# EAGLE board rectifier_board (EAGLE 9.6.2)
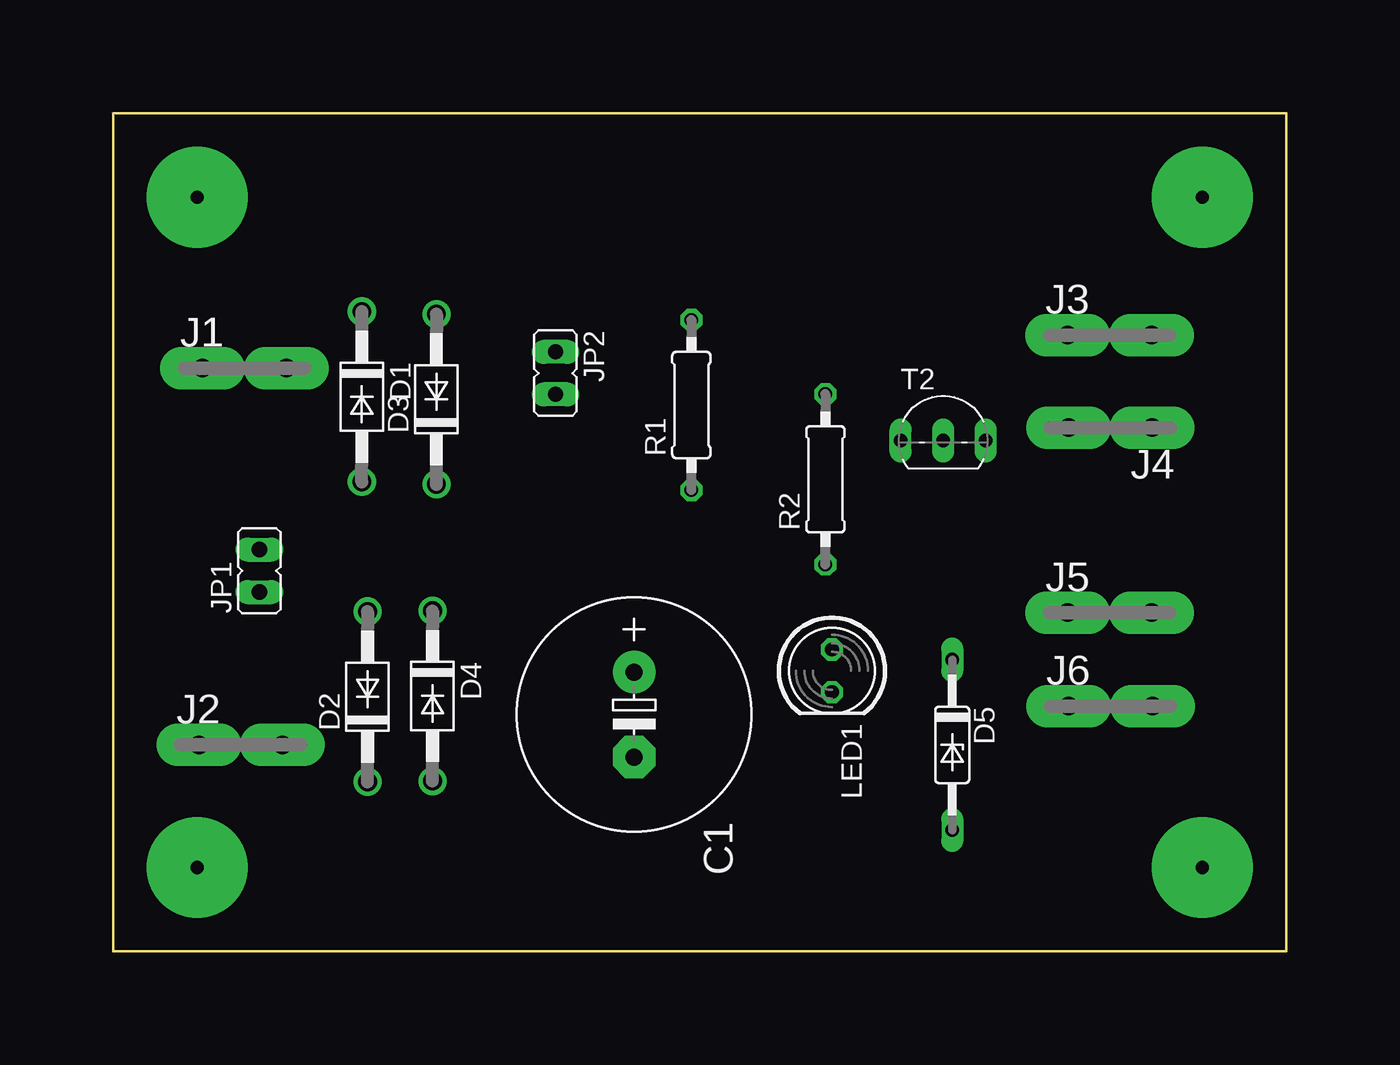
[diagram p0: board, top side]
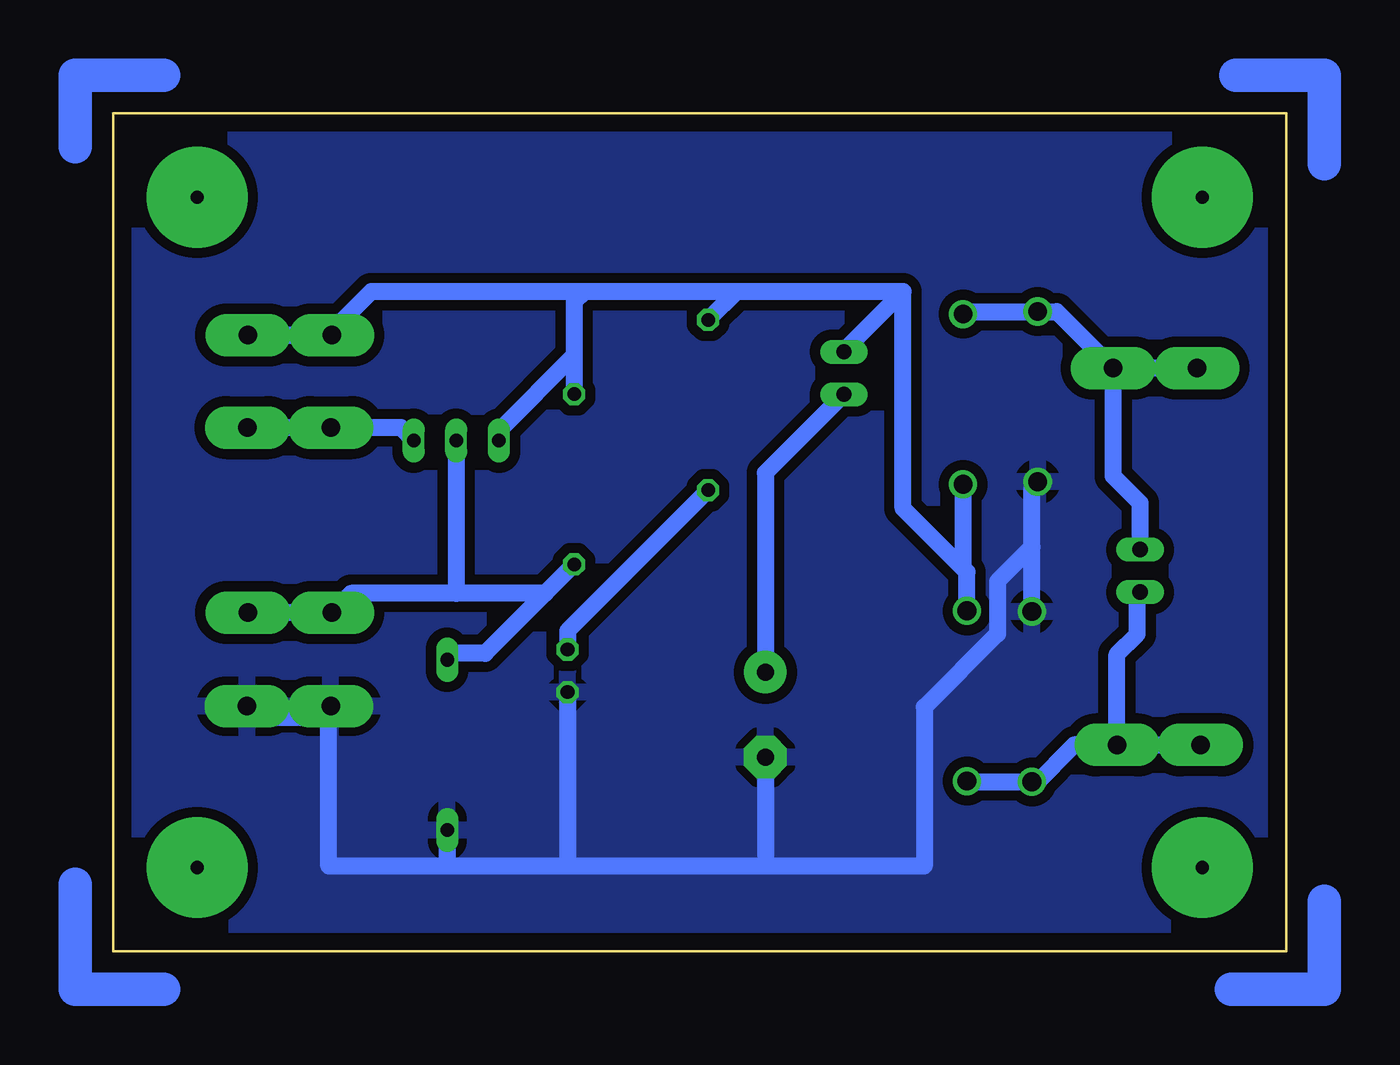
[diagram p1: board, bottom side, seen from below]

Size 70 x 50 mm. Coordinates in mm from the lower left corner, seen from the top.
Outline: 0,0 70,0 70,50 0,50 0,0
Copper layers (1*16): Top 0.035mm / dielectric 1.5mm / Bottom 0.035mm
Design rules "HTL-KLU": minimum track width 16mil, minimum drill 31mil, track to track 16mil, track to pad 16mil, pad to pad 16mil, via to via 16mil, smd to smd 12mil, copper to edge 40mil, drill to drill 16mil, minimum pad ring 10mil, minimum via ring 16mil, stop-mask expansion 4mil, vias tented up to drill 0mil, thermal gap 20mil

## Footprints (pad centres in the part's own frame; a part is rotated, then mirrored left to right if it is on the bottom)
E5-13 = drill 1.016 pad 2.54: + -2.54,0 | drill 1.016 pad 2.54 octagon: - 2.54,0
DO41-10 = drill 1.118: A 5.08,0; C -5.08,0
DO35Z10 = drill 0.813 long: A 5.08,0; C -5.08,0
F061.080 = drill 1.1 pad 2.54 long: 1A -2.5,0; 1B 2.5,0
JP1 = drill 0.914 long: 1 0,-1.27; 2 0,1.27
LED5MM = drill 0.813 octagon: A -1.27,0; K 1.27,0
0207/10 = drill 0.813 octagon: 1 -5.08,0; 2 5.08,0
TO92-CBE = drill 0.813 long: B 0,0; C -2.54,0; E 2.54,0

## Placement (x,y rotation side)
C1  330 mikro  [E5-13]  31.08,14.13 270 top
D1  1N4004  [DO41-10]  14.83,33.1 270 top
D2  1N4004  [DO41-10]  15.17,15.2 90 top
D3  1N4004  [DO41-10]  19.28,32.95 90 top
D4  1N4004  [DO41-10]  19.05,15.24 270 top
D5  [DO35Z10]  50.07,12.32 270 top
J1  PIN2F061.080  [F061.080]  7.82,34.81 0 top
J2  PIN2F061.080  [F061.080]  7.6,12.32 0 top
J3  PIN2F061.080  [F061.080]  59.47,36.78 0 top
J4  PIN2F061.080  [F061.080]  59.51,31.25 180 top
J5  PIN2F061.080  [F061.080]  59.47,20.21 0 top
J6  PIN2F061.080  [F061.080]  59.52,14.64 0 top
JP1  [JP1]  8.71,22.71 0 top
JP2  [JP1]  26.39,34.51 180 top
LED1  [LED5MM]  42.89,16.74 270 top
R1  1kOhm  [0207/10]  34.5,32.6 90 top
R2  680Ohm  [0207/10]  42.5,28.17 90 top
T2  330mikro  [TO92-CBE]  49.53,30.48 0 top

## Library data of the parts
C1 = rcl; SPICEPREFIX: C
D1-D5 = diode
J1-J6 = con-faston; OC_FARNELL: unknown; OC_NEWARK: unknown
JP1 JP2 = jumper
LED1 = led
R1 R2 = rcl; SPICEPREFIX: R
T2 = transistor

## Nets
N$1: D1.C D3.A J1.1A J1.1B JP1.2
N$2: LED1.A R1.1
N$3: D2.C D4.A J2.1A J2.1B JP1.1
N$5: C1.+ JP2.2
N$6: C1.- D1.A D2.A D5.A J6.1A J6.1B LED1.K
N$8: D5.C J5.1A J5.1B R2.1 T2.B
N$9: J4.1A J4.1B T2.E
N$17: D3.C D4.C J3.1A J3.1B JP2.1 R1.2 R2.2 T2.C

## Tracks (layer width: path | path; a pad name or v marks a point on that pad's centre or on a via)
N$1
  Bottom 1.016: J1.1A J1.1B | J1.1B 10.32,28.35 8.71,26.74 JP1.2 | J1.1B 13.69,38.18 D1.C 19.13,38.18 D3.A
N$2
  Bottom 1.016: R1.1 42.89,19.13 LED1.A
N$3
  Bottom 1.016: J2.1B 12.64,12.32 15.01,9.96 D2.C 19.01,10.12 D4.A | J2.1B J2.1A | J2.1B 10.1,17.72 8.89,18.93 8.89,21.26 JP1.1
N$5
  Bottom 1.016: C1.+ 31.08,28.55 JP2.2
N$6
  Bottom 1.016: D2.A 15.17,24.13 | 15.17,24.13 15.17,27.68 D1.A | 15.17,24.13 17.22,22.08 17.22,18.94 21.59,14.57 21.59,5.08 31.08,5.08 C1.- | 30.48,5.08 42.89,5.08 | 50.07,5.08 57.15,5.08 57.15,14.51 | 57.15,14.51 J6.1A | J6.1B 62.23,14.43 62.23,13.97 57.69,13.97 57.15,14.51 | LED1.K 42.89,5.08 | D5.A 50.07,5.08 | 42.89,5.08 50.07,5.08
  pour Bottom (isolate 0.61): -5.08,54.61 76.2,54.61 76.2,-5.08 -7.62,-5.08 -7.62,54.61
N$7  (via drill 0.8 pad 6)
  other vias: 5,45
N$8
  Bottom 1.016: R2.1 44.23,21.36 | 44.23,21.36 47.81,17.78 49.69,17.78 D5.C | 44.23,21.36 49.53,21.36 | 49.53,21.36 55.81,21.36 J5.1A J5.1B | T2.B 49.53,21.36
N$9
  Bottom 1.016: T2.E 52.84,31.25 J4.1B J4.1A
N$10  (via drill 0.8 pad 6)
  other vias: 5,5
N$11  (via drill 0.8 pad 6)
  other vias: 65,5
N$12  (via drill 0.8 pad 6)
  other vias: 65,45
N$13
  Bottom 2: -2.27,47 -2.27,52.27 3,52.27
N$14
  Bottom 2: -2.27,3 -2.27,-2.27 3.27,-2.27
N$15
  Bottom 2: 67,52.27 72.27,52.27 72.27,48
N$16
  Bottom 2: 72.27,4 72.27,-2.27 67,-2.27
N$17
  Bottom 1.016: D3.C 19.28,22.86 | 19.28,22.86 22.86,26.44 22.86,39.37 | 22.86,39.37 26.39,35.84 JP2.1 | 22.86,39.37 32.81,39.37 | 32.81,39.37 R1.2 | 32.81,39.37 41.91,39.37 | 41.91,39.37 42.5,38.78 42.5,35.56 | 42.5,35.56 R2.2 | 41.91,39.37 54.61,39.37 56.97,37.01 | 56.97,37.01 57.2,36.78 J3.1B J3.1A 56.97,37.01 | 42.5,35.56 46.99,31.07 T2.C | 19.28,22.86 19.05,22.63 D4.C